# EAGLE board PCB (EAGLE 9.7.0)
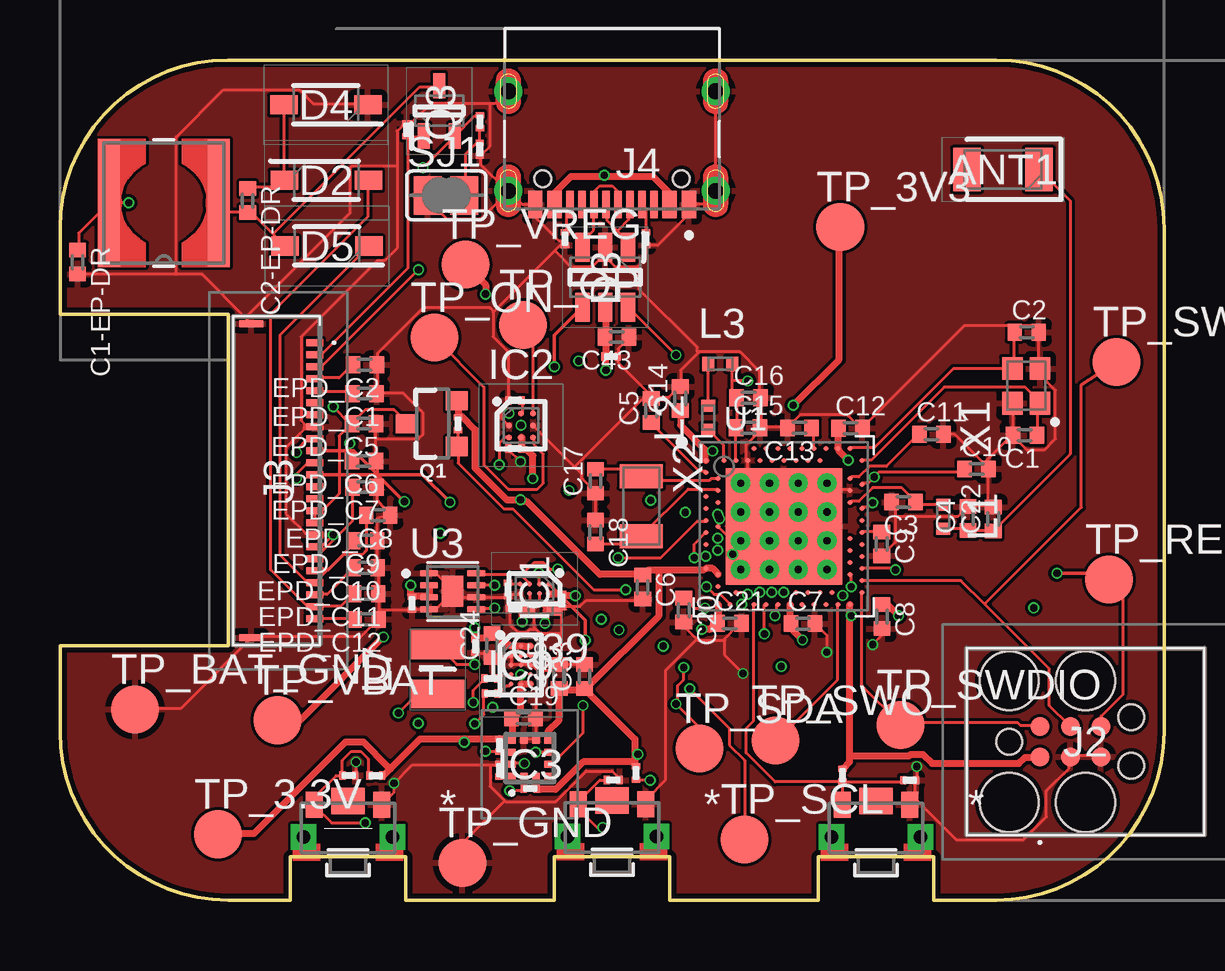
[diagram p0: board, top side]
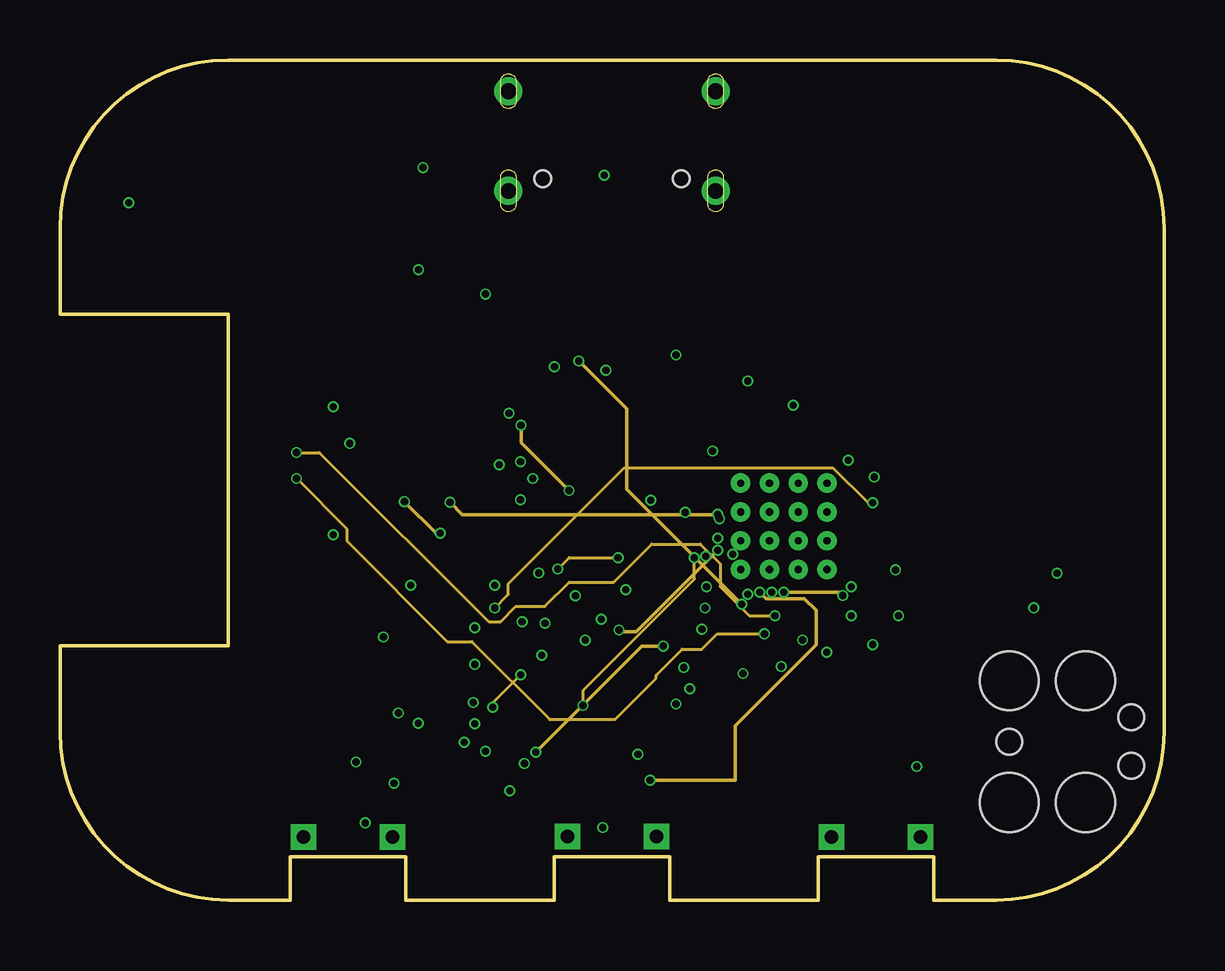
[diagram p1: board, inner layer Route2]
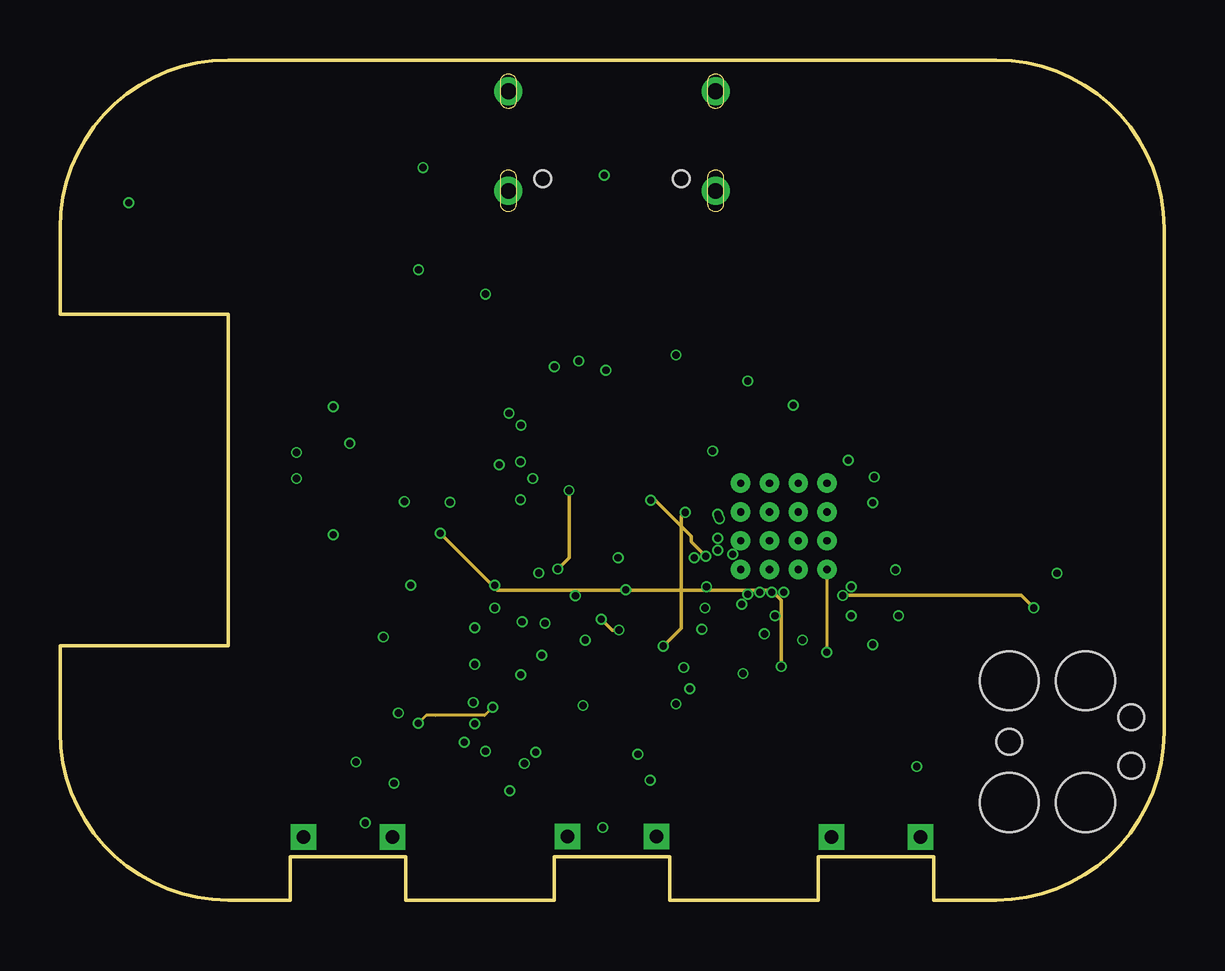
[diagram p2: board, inner layer Route15]
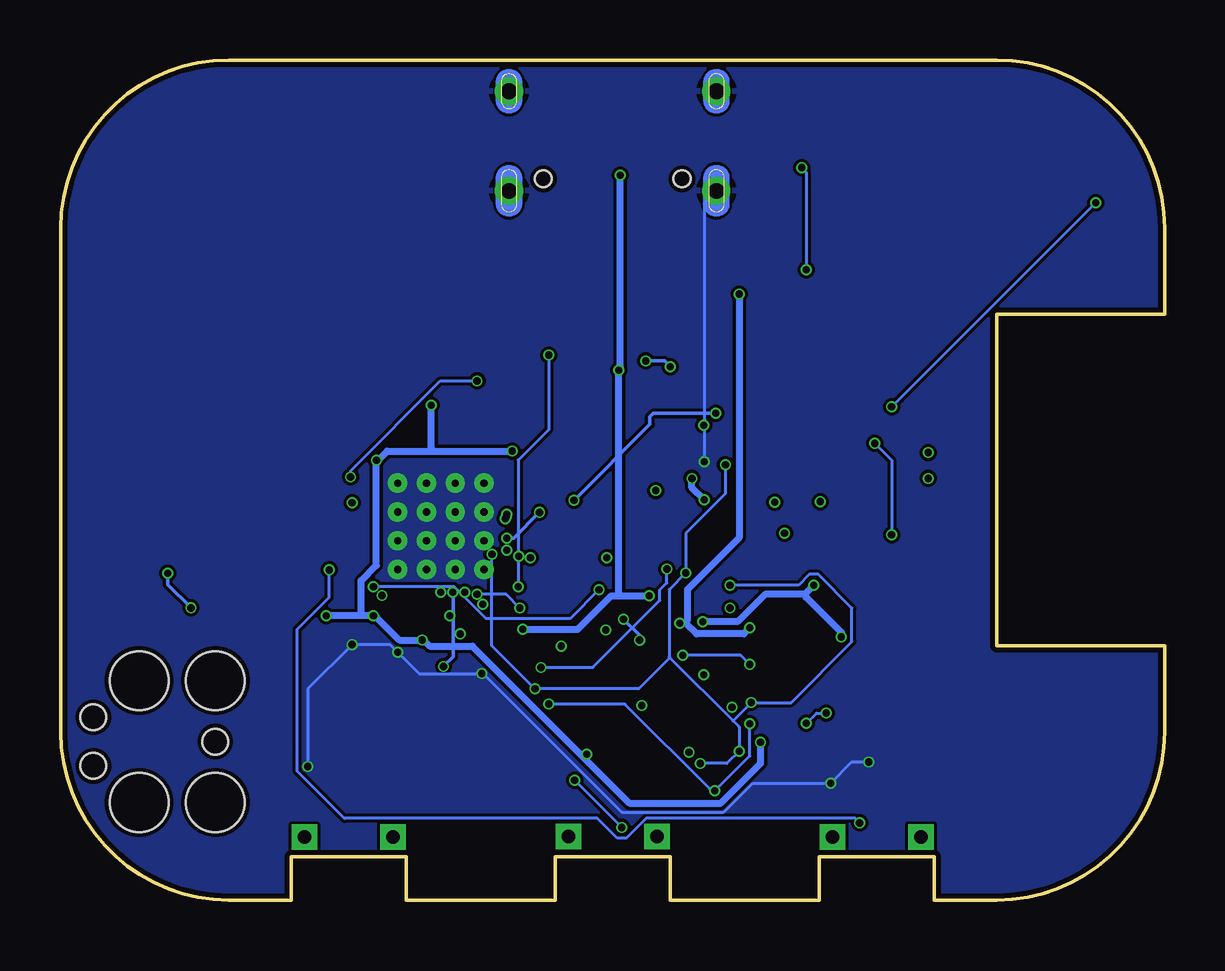
[diagram p3: board, bottom side, seen from below]

Size 46 x 35 mm. Coordinates in mm from the lower left corner, seen from the top.
Outline: 39,0 36.4,0 36.4,1.8 31.6,1.8 31.6,0 25.4,0 25.4,1.8 20.6,1.8 20.6,0 14.4,0 14.4,1.8 9.6,1.8 9.6,0 7,0 arc-90 0,7 0,10.6 7,10.6 7,24.4 0,24.4 0,28 arc-90 7,35 39,35 arc-90 46,28 46,23.94 46,20.77 46,18.92 46,15.76 46,7 arc-90 39,0
Copper layers (1+2*15+16): Top 0.035mm / dielectric 1.6mm / Route2 0.035mm / dielectric 0.15mm / Route15 0.035mm / dielectric 0.2mm / Bottom 0.035mm
Design rules "jlcpcb-2layers.dru *": minimum track width 5mil, minimum drill 0.3mm, track to track 5mil, track to pad 5mil, pad to pad 5mil, via to via 5mil, smd to smd 5mil, copper to edge 0.2mm, drill to drill 6mil, minimum pad ring 10mil, minimum via ring 3mil, stop-mask expansion 4mil, vias tented up to drill 0mil, thermal gap 10mil
Net classes: 1 trasee_alimentare: width 0.3 mm

## Footprints (pad centres in the part's own frame; a part is rotated, then mirrored left to right if it is on the bottom)
2450AT18B100E_ANTC3216X140N = smd 1.15 x 1.8: 1 -1.5,0; 2 1.5,0
PERFECT_0402_0402 = smd 0.6 x 0.7: 1 -0.5,0; 2 0.5,0
GRM011R60J152KE01L_1_0201 = smd 0.35 x 0.25: 1 0,0.275; 2 0,-0.275
NORDIC_NRF_3_RESC0402_N = smd 0.6 x 0.6: 1 -0.55,0; 2 0.55,0
ESP32_C6_LIBRARY_5_SOD3716X135N = smd 1.15 x 0.8: 1 -1.75,0; 2 1.75,0
ESP32_C6_LIBRARY_3_SOT95P280X145-6N = smd 1.2 x 0.6: 1 -1.25,0.95; 2 -1.25,0; 3 -1.25,-0.95; 4 1.25,-0.95; 5 1.25,0; 6 1.25,0.95
BQ25180YBGR_BGA8C40P2X4_100X155X50 = smd 0.2 x 0.2: A1 -0.2,0.6; A2 0.2,0.6; B1 -0.2,0.2; B2 0.2,0.2; C1 -0.2,-0.2; C2 0.2,-0.2; D1 -0.2,-0.6; D2 0.2,-0.6
DRV2605YZFR_BGA9C50P3X3_144X144X62 = smd 0.25 x 0.25: A1 -0.5,0.5; A2 0,0.5; A3 0.5,0.5; B1 -0.5,0; B2 0,0; B3 0.5,0; C1 -0.5,-0.5; C2 0,-0.5; C3 0.5,-0.5
BMA423_BMA423 = smd 0.3 x 0.35: 1 -0.75,-0.775; 2 -0.25,-0.775; 3 0.25,-0.775; 4 0.75,-0.775; 7 0.75,0.775; 8 0.25,0.775; 9 -0.25,0.775; 10 -0.75,0.775 | smd 0.35 x 0.3: 5 0.775,-0.25; 6 0.775,0.25; 11 -0.775,0.25; 12 -0.775,-0.25
RT6160AWSC_BGA15C40P3X5_140X230X60 = smd 0.216 x 0.216: A1 -0.4,0.8; A2 0,0.8; A3 0.4,0.8; B1 -0.4,0.4; B2 0,0.4; B3 0.4,0.4; C1 -0.4,0; C2 0,0; C3 0.4,0; D1 -0.4,-0.4; D2 0,-0.4; D3 0.4,-0.4; E1 -0.4,-0.8; E2 0,-0.8; E3 0.4,-0.8
TC2030-IDC_TC2030IDC = smd 0.783 x 0.783: 1 -0.953,-0.635; 2 -0.953,0.635; 3 0.317,-0.635; 4 0.317,0.635; 5 1.588,-0.635; 6 1.588,0.635 | hole 2.451: -2.223,-2.54; -2.223,2.54; 0.952,-2.54; 0.952,2.54 | hole 1.067: -2.223,0; 2.857,-1.016; 2.857,1.016
503480-2400_5034802400 = smd 0.3 x 0.7: 1 -5.75,1.525; 2 -5.25,1.525; 3 -4.75,1.525; 4 -4.25,1.525; 5 -3.75,1.525; 6 -3.25,1.525; 7 -2.75,1.525; 8 -2.25,1.525; 9 -1.75,1.525; 10 -1.25,1.525; 11 -0.75,1.525; 12 -0.25,1.525; 13 0.25,1.525; 14 0.75,1.525; 15 1.25,1.525; 16 1.75,1.525; 17 2.25,1.525; 18 2.75,1.525; 19 3.25,1.525; 20 3.75,1.525; 21 4.25,1.525; 22 4.75,1.525; 23 5.25,1.525; 24 5.75,1.525 | smd 0.3 x 1: MP1 -6.54,-1.125; MP2 6.54,-1.125
KH-TYPE-C-16P_KINGHELM_KH-TYPE-C-16P = smd 0.6 x 1.15: A1_B12 -3.2,4.725; A4_B9 -2.4,4.725; A9_B4 2.4,4.725; A12_B1 3.2,4.725 | smd 0.3 x 1.15: A5 -1.25,4.725; A6 -0.25,4.725; A7 0.25,4.725; A8 1.25,4.725; B5 1.75,4.725; B6 0.75,4.725; B7 -0.75,4.725; B8 -1.75,4.725 | drill 0.65 pad 1.05: SH1 -4.32,0; SH2 4.32,0; SH3 -4.32,4.15; SH4 4.32,4.15 | hole 0.7: -2.89,3.65; 2.89,3.65
NORDIC_NRF_2_RESC0402_L = smd 0.5 x 0.6: 1 -0.5,0; 2 0.5,0
ESP32_C6_LIBRARY_2_IND_4828-WE-TPC_WRE = smd 0.9 x 5.3: 1 -2.286,0; 2 2.286,0
MLP2016SR47MT0S1_INDC2016X100N = smd 1.2 x 2.2: 1 -1.028,0; 2 1.028,0
ESP32_C6_LIBRARY_4_ESP32_C6_LIBRARY_4_ESP32_C6_LIBRARY_4_ESP32_C6_LIBRARY_4_ESP32_WROVER_SPARKFUN-DISCRETESEMI_SOT23-3 = smd 0.8 x 0.9: 1 -0.95,-1; 2 0.95,-1; 3 0,1.1
ESP32_C6_LIBRARY_6_SOT65P210X110-3N = smd 1.05 x 0.5: 1 -1.05,0.65; 2 -1.05,-0.65; 3 1.05,0
CPF0201D7K68C1_0201 = smd 0.35 x 0.25: 1 0,0.275; 2 0,-0.275
ESP32_C6_LIBRARY_7_JUMPER_SJ = smd 1.168 x 1.6: 1 -0.762,0; 2 0.762,0
2025-10-22_07-23-44_LIBRARY_SW_EVP-AKE31A_PAN = smd 0.711 x 1.092: 1 -1.4,-0.972; 2 1.4,-0.972 | drill 0.559 pad 0.914 square: 3 -1.848,0.381; 4 1.848,0.381 | smd 1.397 x 1.092: 5 0,-1.124
HECTOR_WATCH_1_TP20R = smd 2 x 2: TP 0,0
NORDIC_NRF_4_AQFN50P700X700X85_HS-74N = smd 4.85 x 4.85: P$74 0,0 | drill 0.3 pad 0.6: P$75 -1.8,1.8; P$76 -0.6,1.8; P$77 0.6,1.8; P$78 1.8,1.8; P$79 -1.8,0.6; P$80 -0.6,0.6; P$81 0.6,0.6; P$82 1.8,0.6; P$83 -1.8,-0.6; P$84 -0.6,-0.6; P$85 0.6,-0.6; P$86 1.8,-0.6; P$87 -1.8,-1.8; P$88 -0.6,-1.8; P$89 0.6,-1.8; P$90 1.8,-1.8 | smd 0.2 x 0.2: P$A8 -1.25,3.25; P$A10 -0.75,3.25; P$A12 -0.25,3.25; P$A14 0.25,3.25; P$A16 0.75,3.25; P$A18 1.25,3.25; P$A20 1.75,3.25; P$A22 2.25,3.25; P$A23 2.75,3.25; P$AA24 3.25,-2.25; P$AB2 -2.75,-2.5; P$AC5 -2,-2.75; P$AC9 -1,-2.75; P$AC11 -0.5,-2.75; P$AC13 0,-2.75; P$AC15 0.5,-2.75; P$AC17 1,-2.75; P$AC19 1.5,-2.75; P$AC21 2,-2.75; P$AC24 3.25,-2.75; P$AD2 -2.75,-3.25; P$AD4 -2.25,-3.25; P$AD6 -1.75,-3.25; P$AD8 -1.25,-3.25; P$AD10 -0.75,-3.25; P$AD12 -0.25,-3.25; P$AD14 0.25,-3.25; P$AD16 0.75,-3.25; P$AD18 1.25,-3.25; P$AD20 1.75,-3.25; P$AD22 2.25,-3.25; P$AD23 2.75,-3.25; P$B1 -3.25,2.75; P$B3 -2.5,2.75; P$B5 -2,2.75; P$B7 -1.5,2.75; P$B9 -1,2.75; P$B11 -0.5,2.75; P$B13 0,2.75; P$B15 0.5,2.75; P$B17 1,2.75; P$B19 1.5,2.75; P$B24 3.25,2.75; P$C1 -3.25,2.25; P$D2 -2.75,2; P$D23 2.75,2; P$E24 3.25,1.75; P$F2 -2.75,1.5; P$F23 2.75,1.5; P$G1 -3.25,1.25; P$H2 -2.75,1; P$H23 2.75,1; P$J1 -3.25,0.75; P$J24 3.25,0.75; P$K2 -2.75,0.5; P$L1 -3.25,0.25; P$L24 3.25,0.25; P$M2 -2.75,0; P$N1 -3.25,-0.25; P$N24 3.25,-0.25; P$P2 -2.75,-0.5; P$P23 2.75,-0.5; P$R1 -3.25,-0.75; P$R24 3.25,-0.75; P$T2 -2.75,-1; P$T23 2.75,-1; P$U1 -3.25,-1.25; P$U24 3.25,-1.25; P$V23 2.75,-1.5; P$W1 -3.25,-1.75; P$W24 3.25,-1.75; P$Y2 -2.75,-2; P$Y23 2.75,-2
ESP32_C6_LIBRARY_SON50P200X200X80-9N = smd 0.76 x 0.27: 1 -0.985,0.75; 2 -0.985,0.25; 3 -0.985,-0.25; 4 -0.985,-0.75; 5 0.985,-0.75; 6 0.985,-0.25; 7 0.985,0.25; 8 0.985,0.75 | smd 0.9 x 1.3: 9 0,0
NORDIC_NRF_BT-XTAL_2016_N = smd 0.95 x 0.85: 1 -0.725,-0.575; 2 0.725,-0.575; 3 0.725,0.575; 4 -0.725,0.575
NORDIC_NRF_1_XTAL_3215_N = smd 1 x 1.8: 1 -1.25,0; 2 1.25,0

## Placement (x,y rotation side)
ANT1  2450AT18B100E  [2450AT18B100E_ANTC3216X140N]  39.29,30.44 180 top
C1  12pF  [PERFECT_0402_0402]  40.2,19.36 180 top
C1-EP-DR  10uF  [PERFECT_0402_0402]  0.73,26.58 270 top
C2  12pF  [PERFECT_0402_0402]  40.28,23.66 0 top
C2-EP-DR  4.7uF/25V  [PERFECT_0402_0402]  7.82,29.14 270 top
C3  1pF  [PERFECT_0402_0402]  35.15,16.58 180 top
C4  1pF  [PERFECT_0402_0402]  37.83,15.89 90 top
C5  100nF  [PERFECT_0402_0402]  24.63,20.39 90 top
C6  4.7μF  [PERFECT_0402_0402]  24.28,13.04 270 top
C7  100nF  [PERFECT_0402_0402]  30.95,11.52 0 top
C8  100nF  [PERFECT_0402_0402]  34.25,11.81 270 top
C9  820pF  [PERFECT_0402_0402]  34.24,14.84 270 top
C10  N.C.  [PERFECT_0402_0402]  38.19,17.96 0 top
C11  100pF  [PERFECT_0402_0402]  36.31,19.41 0 top
C12  100nF  [PERFECT_0402_0402]  32.93,19.66 0 top
C13  N.C.  [PERFECT_0402_0402]  30.82,19.67 180 top
C14  4.7μF  [PERFECT_0402_0402]  25.84,20.89 90 top
C15  1.0μF  [PERFECT_0402_0402]  28.67,19.68 0 top
C16  47nF  [PERFECT_0402_0402]  28.69,20.93 0 top
C17  12pF  [PERFECT_0402_0402]  22.31,17.45 90 top
C18  12pF  [PERFECT_0402_0402]  22.31,15.33 270 top
C19  100nF  [PERFECT_0402_0402]  19.31,7.58 0 top
C20  4.7μF  [PERFECT_0402_0402]  25.99,12.08 270 top
C21  4.7μF  [PERFECT_0402_0402]  27.9,11.53 0 top
C22  N.C.  [PERFECT_0402_0402]  38.88,15.87 90 top
C23  0.1uF  [GRM011R60J152KE01L_1_0201]  17.31,10.58 180 top
C24  10uF  [PERFECT_0402_0402]  18,10.6 90 top
C25  22uF  [PERFECT_0402_0402]  20.8,9.31 90 top
C27  0.1uF  [GRM011R60J152KE01L_1_0201]  14.67,12.36 180 top
C29  1uF  [GRM011R60J152KE01L_1_0201]  12.03,5.19 270 top
C30  1uF  [GRM011R60J152KE01L_1_0201]  35.4,4.99 270 top
C31  1uF  [GRM011R60J152KE01L_1_0201]  23.05,5 270 top
C32  1uF  [GRM011R60J152KE01L_1_0201]  18.96,20.82 90 top
C33  22uF  [PERFECT_0402_0402]  21.85,9.31 90 top
C34  0.1uF  [GRM011R60J152KE01L_1_0201]  18.95,18.81 90 top
C37  1uF  [GRM011R60J152KE01L_1_0201]  18.97,12.13 90 top
C38  1uF  [GRM011R60J152KE01L_1_0201]  20.92,12.48 180 top
C39  10uF  [NORDIC_NRF_3_RESC0402_N]  20.04,12.14 180 top
C42  0.1uF  [GRM011R60J152KE01L_1_0201]  22.96,22.64 90 top
C43  4.7uF  [PERFECT_0402_0402]  23.2,23.45 180 top
D2  MBR0530  [ESP32_C6_LIBRARY_5_SOD3716X135N]  11.1,29.99 0 top
D3  USBLC6-2SC6Y  [ESP32_C6_LIBRARY_3_SOT95P280X145-6N]  22.72,25.95 270 top
D4  MBR0530  [ESP32_C6_LIBRARY_5_SOD3716X135N]  11.08,33.13 180 top
D5  MBR0530  [ESP32_C6_LIBRARY_5_SOD3716X135N]  11.12,27.25 180 top
EPD_C1  1uF/50V  [PERFECT_0402_0402]  12.69,21.1 180 top
EPD_C2  1uF/50V  [PERFECT_0402_0402]  12.7,22.3 180 top
EPD_C5  0.1uF/50V  [PERFECT_0402_0402]  12.67,19.85 180 top
EPD_C6  1uF/50V  [PERFECT_0402_0402]  12.66,18.29 180 top
EPD_C7  1uF/50V  [PERFECT_0402_0402]  12.68,17.2 180 top
EPD_C8  1uF/50V  [PERFECT_0402_0402]  13.26,16.03 180 top
EPD_C9  1uF/50V  [PERFECT_0402_0402]  12.72,14.97 180 top
EPD_C10  1uF/50V  [PERFECT_0402_0402]  12.74,13.84 180 top
EPD_C11  1uF/50V  [PERFECT_0402_0402]  12.76,12.76 180 top
EPD_C12  1uF/50V  [PERFECT_0402_0402]  12.78,11.69 180 top
IC1  BQ25180YBGR  [BQ25180YBGR_BGA8C40P2X4_100X155X50]  19.77,12.97 270 top
IC2  DRV2605YZFR  [DRV2605YZFR_BGA9C50P3X3_144X144X62]  19.21,19.78 0 top
IC3  BMA421  [BMA423_BMA423]  19.58,5.91 0 top
IC9  RT6160AWSC  [RT6160AWSC_BGA15C40P3X5_140X230X60]  19.2,9.79 0 top
J2  TC2030-IDC  [TC2030-IDC_TC2030IDC]  41.78,6.6 0 top
J3  503480-2400  [503480-2400_5034802400]  9.09,17.47 270 top
J4  KH-TYPE-C-16P  [KH-TYPE-C-16P_KINGHELM_KH-TYPE-C-16P]  23,33.7 180 top
L1  3.9nH  [NORDIC_NRF_2_RESC0402_L]  36.8,15.97 270 top
L2  10μH  [NORDIC_NRF_2_RESC0402_L]  27.01,20.09 90 top
L3  15nH  [NORDIC_NRF_2_RESC0402_L]  27.5,22.34 0 top
L5  68uH  [ESP32_C6_LIBRARY_2_IND_4828-WE-TPC_WRE]  4.33,29.04 180 top
L7  FTC252012SR47MBCA  [MLP2016SR47MT0S1_INDC2016X100N]  15.74,9.61 270 top
Q1  20V/4.2A/52mΩ/1.4W  [ESP32_C6_LIBRARY_4_ESP32_C6_LIBRARY_4_ESP32_C6_LIBRARY_4_ESP32_C6_LIBRARY_4_ESP32_WROVER_SPARKFUN-DISCRETESEMI_SOT23-3]  15.53,19.85 90 top
Q3  SI1308EDL-T1-GE3  [ESP32_C6_LIBRARY_6_SOT65P210X110-3N]  15.8,32.88 90 top
R1_EP_DR  0.47  [CPF0201D7K68C1_0201]  17.5,32.43 180 top
R1_USB  5K1  [CPF0201D7K68C1_0201]  24.41,27.55 180 top
R2  0  [CPF0201D7K68C1_0201]  17.97,8.61 90 top
R2_EP_DR  10K  [CPF0201D7K68C1_0201]  14.44,32.09 0 top
R2_USB  5K1  [CPF0201D7K68C1_0201]  21.04,27.55 0 top
R3  0  [CPF0201D7K68C1_0201]  18.31,5.41 0 top
R4  0  [CPF0201D7K68C1_0201]  17.95,9.23 90 top
R5  10k  [CPF0201D7K68C1_0201]  32.6,5.2 180 top
R7  10k  [CPF0201D7K68C1_0201]  13.15,5.18 90 top
R8  10k  [CPF0201D7K68C1_0201]  24,5.29 180 top
R9  10K  [CPF0201D7K68C1_0201]  18.66,12.94 180 top
R17  3K3  [CPF0201D7K68C1_0201]  18.31,6.45 0 top
R18  3K3  [CPF0201D7K68C1_0201]  19.59,4.64 270 top
R_PWR_EPD  10K  [CPF0201D7K68C1_0201]  16.59,19.85 180 top
R_TYPE_SEL  2.2  [CPF0201D7K68C1_0201]  17.49,31.28 180 top
SJ1  [ESP32_C6_LIBRARY_7_JUMPER_SJ]  16.09,29.36 0 top
SW_DN  [2025-10-22_07-23-44_LIBRARY_SW_EVP-AKE31A_PAN]  12,3 180 top
SW_ENT  [2025-10-22_07-23-44_LIBRARY_SW_EVP-AKE31A_PAN]  23,3.02 180 top
SW_UP  [2025-10-22_07-23-44_LIBRARY_SW_EVP-AKE31A_PAN]  34,3 180 top
TP_3.3V  HECTOR_WATCH_1_TPTP20R  [HECTOR_WATCH_1_TP20R]  6.59,2.74 0 top
TP_3V3  HECTOR_WATCH_1_TPTP20R  [HECTOR_WATCH_1_TP20R]  32.51,28.04 0 top
TP_BAT_GND  HECTOR_WATCH_1_TPTP20R  [HECTOR_WATCH_1_TP20R]  3.13,7.94 0 top
TP_GND  HECTOR_WATCH_1_TPTP20R  [HECTOR_WATCH_1_TP20R]  16.77,1.55 0 top
TP_ON  HECTOR_WATCH_1_TPTP20R  [HECTOR_WATCH_1_TP20R]  15.6,23.43 0 top
TP_OP  HECTOR_WATCH_1_TPTP20R  [HECTOR_WATCH_1_TP20R]  19.29,23.96 0 top
TP_RESET  HECTOR_WATCH_1_TPTP20R  [HECTOR_WATCH_1_TP20R]  43.71,13.36 0 top
TP_SCL  HECTOR_WATCH_1_TPTP20R  [HECTOR_WATCH_1_TP20R]  28.53,2.53 0 top
TP_SDA  HECTOR_WATCH_1_TPTP20R  [HECTOR_WATCH_1_TP20R]  26.64,6.31 0 top
TP_SWDCLK  HECTOR_WATCH_1_TPTP20R  [HECTOR_WATCH_1_TP20R]  44.03,22.42 0 top
TP_SWDIO  HECTOR_WATCH_1_TPTP20R  [HECTOR_WATCH_1_TP20R]  35.02,7.29 0 top
TP_SWO  HECTOR_WATCH_1_TPTP20R  [HECTOR_WATCH_1_TP20R]  29.81,6.64 0 top
TP_VBAT  HECTOR_WATCH_1_TPTP20R  [HECTOR_WATCH_1_TP20R]  9.06,7.49 0 top
TP_VREG  HECTOR_WATCH_1_TPTP20R  [HECTOR_WATCH_1_TP20R]  16.9,26.48 0 top
U1  NRF52840_QF  [NORDIC_NRF_4_AQFN50P700X700X85_HS-74N]  30.16,15.57 0 top
U3  MAX17048G+T10  [ESP32_C6_LIBRARY_SON50P200X200X80-9N]  16.36,12.86 0 top
X1  32MHz  [NORDIC_NRF_BT-XTAL_2016_N]  40.26,21.42 90 top
X2  32.768kHz  [NORDIC_NRF_1_XTAL_3215_N]  24.22,16.41 270 top

## Library data of the parts
ANT1 = InkTime_v5; ARROW_PART_NUMBER: 2450AT18B100E; ARROW_PRICE-STOCK: https://www.arrow.com/en/products/2450at18b100e/johanson-dielectrics?utm_currency=USD&region=nac; DESCRIPTION: Antennas 2.45GHz ANTENNA; HEIGHT: 1.4mm; MANUFACTURER_NAME: JOHANSON TECHNOLOGY; MANUFACTURER_PART_NUMBER: 2450AT18B100E; MOUSER_PART_NUMBER: 609-2450AT18B100E; MOUSER_PRICE-STOCK: https://www.mouser.co.uk/ProductDetail/Johanson-Technology/2450AT18B100E?qs=yCnrNFeXz%252Bh5MFsFIXGZGA%3D%3D
C1 C1-EP-DR C2 C2-EP-DR C3-C25 C27 C29-C34 C37-C39 C42 C43 EPD_C1 EPD_C2 EPD_C5-EPD_C12 L1-L3 R1_EP_DR R1_USB R2 R2_EP_DR R2_USB R3-R5 R7-R9 R17 R18 R_PWR_EPD R_TYPE_SEL SJ1 TP_3.3V TP_3V3 TP_BAT_GND TP_GND TP_ON TP_OP TP_RESET TP_SCL TP_SDA TP_SWDCLK TP_SWDIO TP_SWO TP_VBAT TP_VREG U1 X1 X2 = InkTime_v5
D2 D4 D5 = InkTime_v5; AVAILABILITY: In Stock; CHECK_PRICES: https://www.snapeda.com/parts/MBR0530/Onsemi/view-part/?ref=eda; DESCRIPTION: Diode Schottky 30 V 500mA Surface Mount SOD-123; MF: ON Semiconductor; MP: MBR0530; PACKAGE: SOD-123-2 ON Semiconductor; PRICE: None; PURCHASE-URL: https://www.snapeda.com/api/url_track_click_mouser/?unipart_id=179458&manufacturer=ON Semiconductor&part_name=MBR0530&search_term=None; SNAPEDA_LINK: https://www.snapeda.com/parts/MBR0530/Onsemi/view-part/?ref=snap
D3 = InkTime_v5; AVAILABILITY: In Stock; CHECK_PRICES: https://www.snapeda.com/parts/USBLC6-2SC6Y/STMicroelectronics/view-part/?ref=eda; DESCRIPTION: 17V Clamp 5A (8/20µs) Ipp Tvs Diode Surface Mount SOT-23-6; MF: STMicroelectronics; MP: USBLC6-2SC6Y; PACKAGE: SOT-23-6 STMicroelectronics; PRICE: None; SNAPEDA_LINK: https://www.snapeda.com/parts/USBLC6-2SC6Y/STMicroelectronics/view-part/?ref=snap
IC1 = InkTime_v5; ARROW_PART_NUMBER: BQ25180YBGR; ARROW_PRICE-STOCK: https://www.arrow.com/en/products/bq25180ybgr/texas-instruments?utm_currency=USD&region=nac; DESCRIPTION: Charger IC Lithium Ion/Polymer, Lithium Iron Phosphate 8-DSBGA (1.6x1.1); HEIGHT: 0.5mm; MANUFACTURER_NAME: Texas Instruments; MANUFACTURER_PART_NUMBER: BQ25180YBGR; MOUSER_PART_NUMBER: 595-BQ25180YBGR; MOUSER_PRICE-STOCK: https://www.mouser.co.uk/ProductDetail/Texas-Instruments/BQ25180YBGR?qs=doiCPypUmgEWjAK%252BJAX6Tw%3D%3D
IC2 = InkTime_v5; ARROW_PART_NUMBER: DRV2605YZFR; ARROW_PRICE-STOCK: https://www.arrow.com/en/products/drv2605yzfr/texas-instruments?region=nac; DESCRIPTION: Haptic Driver for ERM/LRA with Built-In Library and Smart Loop Architecture; HEIGHT: 0.625mm; MANUFACTURER_NAME: Texas Instruments; MANUFACTURER_PART_NUMBER: DRV2605YZFR
IC3 = InkTime_v5; ARROW_PART_NUMBER: BMA423; ARROW_PRICE-STOCK: https://www.arrow.com/en/products/bma423/bosch; DESCRIPTION: Accelerometers Triaxial low-g 12bit Acceleration Sensor; HEIGHT: 1mm; MANUFACTURER_NAME: BOSCH; MANUFACTURER_PART_NUMBER: BMA423; MOUSER_PART_NUMBER: 262-BMA423; MOUSER_PRICE-STOCK: https://www.mouser.co.uk/ProductDetail/Bosch-Sensortec/BMA423?qs=HXFqYaX1Q2xC%252BSgeGoX3mg%3D%3D
IC9 = InkTime_v5; DESCRIPTION: Buck-Boost Regulator Positive Output Step-Up/Step-Down I2C DC-DC Controller IC 15-WL-CSP (BSC) (1.4x2.3); HEIGHT: 0.6mm; MANUFACTURER_NAME: RICHTEK; MANUFACTURER_PART_NUMBER: RT6160AWSC; MOUSER_PART_NUMBER: 835-RT6160AWSC; MOUSER_PRICE-STOCK: https://www.mouser.co.uk/ProductDetail/Richtek/RT6160AWSC?qs=amGC7iS6iy%2FLd9PSoixZXQ%3D%3D
J2 = InkTime_v5; DESCRIPTION: CABLE ADAPTER 6 POS; HEIGHT: 19mm; MANUFACTURER_NAME: Tag Connect; MANUFACTURER_PART_NUMBER: TC2030-IDC
J3 = InkTime_v5; DESCRIPTION: FFC & FPC Connectors 0.5mm FPC RA SMT Dual Contact 24Ckt; HEIGHT: 1.87mm; MANUFACTURER_NAME: Molex; MANUFACTURER_PART_NUMBER: 503480-2400; MOUSER_PART_NUMBER: 538-503480-2400; MOUSER_PRICE-STOCK: https://www.mouser.co.uk/ProductDetail/Molex/503480-2400?qs=OAhjpuo3Vu7efIoxFh9AOw%3D%3D
J4 = InkTime_v5; AVAILABILITY: Not in stock; CHECK_PRICES: https://www.snapeda.com/parts/KH-TYPE-C-16P/Kinghelm/view-part/?ref=eda; MF: kinghelm; MP: KH-TYPE-C-16P; PACKAGE: None; PRICE: None; SNAPEDA_LINK: https://www.snapeda.com/parts/KH-TYPE-C-16P/Kinghelm/view-part/?ref=snap
L5 = InkTime_v5; COPYRIGHT: Copyright (C) 2024 Ultra Librarian. All rights reserved.; MANUFACTURER_PART_NUMBER: 744043680; MFR_NAME: Wurth Electronics
L7 = InkTime_v5; DESCRIPTION: SMD / SMT Inductors (Coils), L=0.47?H, L x W x T :; HEIGHT: 1mm; JLCPCB: https://jlcpcb.com/partdetail/6763488-FTC252012SR47MBCA/C5832368; MANUFACTURER_NAME: TDK; MANUFACTURER_PART_NUMBER: FTC252012SR47MBCA
Q1 = InkTime_v5; PROD_ID: TRAN-14388
Q3 = InkTime_v5; AVAILABILITY: In Stock; CHECK_PRICES: https://www.snapeda.com/parts/SI1308EDL-T1-GE3/Vishay+Siliconix/view-part/?ref=eda; DESCRIPTION: Si1308EDL-T1-GE3 N-channel MOSFET Transistor, 1.5 A, 30 V, 3-Pin SC-70 | Siliconix / Vishay SI1308EDL-T1-GE3; MF: Vishay Siliconix; MP: SI1308EDL-T1-GE3; PACKAGE: SOT-323 Vishay Semiconductor; PRICE: None; PURCHASE-URL: https://www.snapeda.com/api/url_track_click_mouser/?unipart_id=274603&manufacturer=Vishay Siliconix&part_name=SI1308EDL-T1-GE3&search_term=None; SNAPEDA_LINK: https://www.snapeda.com/parts/SI1308EDL-T1-GE3/Vishay+Siliconix/view-part/?ref=snap
SW_DN SW_ENT SW_UP = InkTime_v5; COPYRIGHT: Copyright (C) 2025 Ultra Librarian. All rights reserved.; DIGI-KEY_PART_NUMBER_1: P123437TR-ND; DIGI-KEY_PART_NUMBER_2: P123437CT-ND; DIGI-KEY_PART_NUMBER_3: P123437DKR-ND; MANUFACTURER_NAME: Panasonic; MANUFACTURER_PART_NUMBER: EVP-AKE31A
U3 = InkTime_v5; AVAILABILITY: In Stock; CHECK_PRICES: https://www.snapeda.com/parts/MAX17048G+T10/Analog+Devices/view-part/?ref=eda; DESCRIPTION: 3µA 1-Cell/2-Cell Fuel Gauge with ModelGauge; MF: Analog Devices; MP: MAX17048G+T10; PACKAGE: TDFN-8 Maxim; PRICE: None; PURCHASE-URL: https://www.snapeda.com/api/url_track_click_mouser/?unipart_id=329239&manufacturer=Analog Devices&part_name=MAX17048G+T10&search_term=None; SNAPEDA_LINK: https://www.snapeda.com/parts/MAX17048G+T10/Analog+Devices/view-part/?ref=snap

## Nets
3V3 [trasee_alimentare]: C6.1 C7.1 C8.1 C12.1 C14.1 C19.1 C25.1 C33.1 C34.2 IC2.C2 IC3.3 IC3.7 IC3.10 IC9.E2 IC9.E3 J2.1 Q1.2 R5.2 R7.2 R8.2 R17.1 R18.1 R_PWR_EPD.2 TP_3.3V.TP TP_3V3.TP U1.P$A22 U1.P$AD14 U1.P$AD23 U1.P$B1 U1.P$W1 U1.P$Y2
ALERT: U1.P$J24 U3.5
D+: D3.4 U1.P$AD6
D-: D3.6 U1.P$AD4
DEC1: C5.1 U1.P$C1
DEC3: C11.1 U1.P$D23
DEC4_6: C10.1 C15.1 C16.1 L3.2 U1.P$B5 U1.P$E24
DN: D3.1 J4.A7 J4.B7
DP: D3.3 J4.A6 J4.B6
EPD_3V3: C1-EP-DR.1 EPD_C5.2 J3.15 J3.16 L5.2 Q1.3
EPD_BUSY: J3.9 U1.P$AD12
EPD_CS: J3.12 U1.P$K2
EPD_DC: J3.11 U1.P$AD10
EPD_RST: J3.10 U1.P$AC11
GDR: J3.2 Q3.1 R2_EP_DR.2
GND: C1-EP-DR.2 C1.2 C2.2 C3.2 C4.2 C5.2 C6.2 C7.2 C8.2 C9.2 C10.2 C11.2 C12.2 C13.2 C14.2 C15.2 C16.2 C17.1 C18.1 C19.2 C20.2 C21.2 C22.2 C23.1 C24.1 C25.2 C27.1 C29.1 C30.1 C31.1 C32.1 C33.2 C34.1 C37.1 C38.1 C39.2 C42.2 C43.1 D3.2 D4.1 EPD_C1.1 EPD_C2.1 EPD_C5.1 EPD_C6.1 EPD_C7.1 EPD_C8.1 EPD_C9.1 EPD_C10.1 EPD_C11.1 EPD_C12.1 IC1.D2 IC2.B1 IC2.B3 IC3.8 IC3.9 IC9.B1 IC9.C1 IC9.C2 IC9.C3 J2.3 J2.5 J3.8 J3.17 J3.MP1 J3.MP2 J4.A1_B12 J4.A12_B1 J4.SH1 J4.SH2 J4.SH3 J4.SH4 R1_USB.1 R2_EP_DR.1 R2_USB.2 R3.1 R9.1 R_TYPE_SEL.1 SJ1.1 SW_DN.1 SW_ENT.1 SW_UP.1 TP_BAT_GND.TP TP_GND.TP U1.P$74 U1.P$75 U1.P$76 U1.P$77 U1.P$78 U1.P$79 U1.P$80 U1.P$81 U1.P$82 U1.P$83 U1.P$84 U1.P$85 U1.P$86 U1.P$87 U1.P$88 U1.P$89 U1.P$90 U1.P$B7 U1.P$F23 U3.1 U3.4 U3.6 U3.9 X1.2 X1.4
HAPTIC_EN: IC2.A1 U1.P$U1
IMU_INT1: IC3.5 U1.P$N1
IMU_INT2: IC3.6 U1.P$P2
LX1: IC9.B2 IC9.B3 L7.1
LX2: IC9.D2 L7.2
MOSI: J3.14
N$1: IC9.D1 R4.2
N$2: IC9.E1 R2.2
N$3: IC1.D1 R9.2
N$4: C9.1 U1.P$N24
N$5: L2.2 L3.1
N$6: C3.1 L1.1 U1.P$H23
N$7: IC3.1 R3.2
N$8: L2.1 U1.P$B3
N$9: C1.1 U1.P$B24 X1.1
N$10: C2.1 U1.P$A23 X1.3
N$11: C20.1 U1.P$AC5
N$12: C13.1 U1.P$A18
N$18: J4.B5 R2_USB.1
N$19: J4.A5 R1_USB.2
N$23: C2-EP-DR.2 D5.2 L5.1 Q3.3
N$25: C2-EP-DR.1 D2.1 D4.2
N$27: R1_EP_DR.1 R_TYPE_SEL.2 SJ1.2
N$28: EPD_C1.2 J3.5
N$29: EPD_C2.2 J3.4
N$30: EPD_C6.2 J3.18
N$31: EPD_C7.2 J3.19
N$32: EPD_C8.2 J3.20
N$33: EPD_C10.2 J3.22
N$34: EPD_C12.2 J3.24
N$37: C32.2 IC2.A2
OUT+: IC2.A3 TP_OP.TP
OUT-: IC2.C3 TP_ON.TP
P0.00/XL1: C17.2 U1.P$D2 X2.1
P0.01/XL2: C18.2 U1.P$F2 X2.2
P0.04: U1.P$J1
P0.09: U1.P$L24
P0.13: C30.2 R5.1 SW_UP.2 U1.P$AD8
P0.14: C31.2 R8.1 SW_ENT.2 U1.P$AC9
P0.19: U1.P$AC15
P0.20: U1.P$AD16
P0.21: U1.P$AC17
P0.22: U1.P$AD18
P0.23: U1.P$AC19
P0.24: U1.P$AD20
P0.25: U1.P$AC21
P0.26: U1.P$G1
P0.27: U1.P$H2
P1.01: Q1.1 R_PWR_EPD.1 U1.P$Y23
P1.02: C29.2 R7.1 SW_DN.2 U1.P$W24
P1.03: U1.P$V23
P1.04: U1.P$U24
P1.05: U1.P$T23
P1.06: U1.P$R24
P1.07: U1.P$P23
P1.09: U1.P$R1
PMIC_INT: IC1.A1 U1.P$T2
PREVGH: D5.1 EPD_C9.2 J3.21
PREVGL: D2.2 EPD_C11.2 J3.23
RESE: J3.3 Q3.2 R1_EP_DR.2
RESET: J2.6 TP_RESET.TP U1.P$AC13
RF: ANT1.1 C4.1 C22.1 L1.2
SCK: J3.13
SCL: IC1.B1 IC2.C1 IC3.12 R4.1 R17.2 TP_SCL.TP U1.P$M2 U3.7
SDA: IC1.C1 IC2.B2 IC3.2 R2.1 R18.2 TP_SDA.TP U1.P$L1 U3.8
SWDCLK: J2.4 TP_SWDCLK.TP U1.P$AA24
SWDIO: J2.2 TP_SWDIO.TP U1.P$AC24
SWO: TP_SWO.TP U1.P$AD22
VBAT [trasee_alimentare]: C27.2 C37.2 IC1.C2 TP_VBAT.TP U3.2 U3.3
VBUS [trasee_alimentare]: C21.1 C38.2 C42.1 C43.2 D3.5 IC1.A2 J4.A4_B9 J4.A9_B4 U1.P$AD2
VREG [trasee_alimentare]: C23.2 C24.2 C39.1 IC1.B2 IC9.A1 IC9.A2 IC9.A3 TP_VREG.TP

## Tracks (layer width: path | path; a pad name or v marks a point on that pad's centre or on a via)
3V3  (via drill 0.3)
  Top 0.3: 19.25,18.83 19.25,19.28 IC2.C2 | 19.25,18.83 C34.2 | Q1.2 16.59,20.74 16.59,20.17 R_PWR_EPD.2 16.71,20.17 17.29,19.59 17.29,18.01 18.62,16.67 v19.19,16.67 19.32,16.61 19.44,16.61 22.49,13.56 24.14,13.56 C6.1 24.33,13.56 24.52,13.75 24.97,13.75 | v19.7,17.56 19.7,18.52 19.44,18.77 19.38,18.77 19.25,18.83 | 26.94,13.82 27.19,13.82 27.38,13.63 U1.P$Y2 | 26.94,13.82 U1.P$W1 | 24.97,13.75 26.81,13.75 26.94,13.82 | IC3.7 20.33,6.71 20.33,7.02 20.78,7.47 20.78,8.8 C25.1 20.91,8.74 21.75,8.74 C33.1 | IC3.3 19.82,5.12 19.82,4.67 R18.1 20.02,4.61 20.65,4.61 21.79,5.75 23.83,5.75 23.95,5.75 | 23.95,6.07 23.95,6.71 C33.1 | 23.95,6.07 23.95,5.75 | 23.95,5.75 23.95,5.63 R8.2 | 24.97,13.75 24.97,13.63 24.97,11.85 21.96,8.84 C33.1 | 19.25,8.99 19.57,8.99 IC9.E3 | 19.25,8.99 IC9.E2 | 19.25,8.99 19.19,8.86 19.19,7.91 18.87,7.59 C19.1 18.87,7.47 18.87,6.83 IC3.10 18.81,6.71 18.43,6.71 R17.1 18.3,6.71 16.84,6.71 | 13.76,5.47 15,6.71 16.84,6.71 | 13.76,5.47 13.47,5.18 R7.2 | TP_3.3V.TP 6.62,2.77 8.08,2.77 11.89,6.58 12.65,6.58 13.66,5.56 13.76,5.47 | 26.87,18.71 26.87,18.77 25.86,19.79 25.86,20.36 C14.1 | 26.87,18.71 26.87,18.33 U1.P$B1 | 32.4,18.83 32.4,19.66 C12.1 | 32.4,18.83 U1.P$A22 | U1.P$AD14 30.43,12.29 30.43,11.53 C7.1 30.56,11.4 30.56,11.21 v30.94,10.83 | 32.91,6.01 32.91,5.75 32.65,5.5 R5.2 | 32.91,6.01 32.91,11.85 | 32.91,11.85 32.91,12.29 U1.P$AD23 | v34.94,11.85 34.49,12.29 34.3,12.29 C8.1 | v32.97,11.85 32.91,11.85 | J2.1 40.78,5.94 40.21,5.94 39.95,5.69 36.34,5.69 35.95,6.07 35.45,6.07 35.38,6.01 33.03,6.01 32.91,6.01 | v32.84,18.33 32.46,18.71 32.4,18.83 | v27.19,18.71 27,18.71 26.87,18.71
  Top 0.3: v30.56,20.61 32.46,22.52 32.46,27.98 TP_3V3.TP | v16.84,6.58 16.84,6.71 | v24.08,6.07 23.95,6.07
  Bottom 0.3: v19.7,17.56 19.7,17.18 v19.19,16.67 | 33.48,11.85 v32.97,11.85 32.84,11.79 31.89,10.83 v30.94,10.83 30.81,10.77 30.62,10.58 28.84,10.58 24.24,5.97 | 33.48,11.85 v34.94,11.85 | 33.48,11.85 33.48,11.98 33.48,13.31 32.84,13.94 v32.84,18.33 32.72,18.39 32.4,18.71 30.56,18.71 | 30.56,18.71 v27.19,18.71 | v30.56,20.61 30.56,18.83 30.56,18.71 | v16.84,6.58 16.84,5.69 18.49,4.04 22.3,4.04 24.24,5.97 | v24.08,6.07 24.14,6.07 24.24,5.97
ALERT  (via drill 0.3)
  Top 0.127: v33.86,16.55 33.67,16.36 33.41,16.36 U1.P$J24 | v18.11,12.17 17.35,12.17 U3.5
  Route2 0.127: v33.86,16.55 33.67,16.55 32.21,18.01 23.51,18.01 18.68,13.18 18.68,12.74 v18.11,12.17
D+  (via drill 0.3)
  Top 0.152: v20.6,22.22 20.6,23.53 D3.4
  Route2 0.152: U1.P$AD6 23.61,17.12 23.61,19.44 23.61,20.47 v21.62,22.46
  Bottom 0.152: v21.62,22.46 20.84,22.46 v20.6,22.22
  other vias: 28.41,12.32
D-  (via drill 0.3)
  Top 0.127: v26.94,13.05 27.25,12.74 27.51,12.74 27.89,12.36 U1.P$AD4 | v25.67,22.71 23.7,24.68 D3.6
  Bottom 0.127: v26.94,13.05 26.94,18.33 25.67,19.59 v25.67,22.71
DEC1
  Top 0.127: U1.P$C1 26.87,17.88 26.62,17.88 24.65,19.85 C5.1
DEC3
  Top 0.127: U1.P$D23 32.97,17.63 33.29,17.63 33.73,18.07 34.43,18.07 35.76,19.41 C11.1
DEC4_6  (via drill 0.3)
  Top 0.127: U1.P$B5 28.14,18.33 28.14,19.66 C15.1 28.21,19.72 28.21,20.87 C16.1 28.14,20.99 28.02,21.12 28.02,21.63 | 28.02,21.63 28.02,22.33 L3.2 | U1.P$E24 33.41,17.37 33.67,17.37 v33.92,17.63 34.11,17.82 37.54,17.82 37.67,17.95 C10.1 | v28.65,21.63 28.02,21.63
  Bottom 0.127: v28.65,21.63 30.18,21.63 33.92,17.88 v33.92,17.63
DN
  Top 0.127: 23.22,27.88 23.64,27.47 23.64,27.22 D3.1 | 23.22,27.88 22.81,28.3 22.81,28.93 J4.A7 | J4.B7 23.7,28.93 23.7,28.36 23.25,27.91 23.22,27.88
DP
  Top 0.127: D3.3 21.79,27.22 21.79,27.47 22.24,27.91 22.24,28.93 J4.B6 22.3,28.99 22.3,29.56 22.49,29.76 23,29.76 23.19,29.56 23.19,28.99 J4.A6
EPD_3V3  (via drill 0.3)
  Top 0.127: C1-EP-DR.1 0.77,27.09 0.77,27.79 1.98,28.99 L5.2 2.11,29.06 v2.87,29.06 | J3.16 10.62,16.17 J3.15 10.68,16.17 10.87,16.17 11.63,16.93 11.63,19.34 12.14,19.85 EPD_C5.2 | EPD_C5.2 12.21,19.91 12.71,20.42 13.92,20.42 14.43,19.91 Q1.3 | v11.38,20.55 12.08,19.85 EPD_C5.2
  Bottom 0.127: v11.38,20.55 v2.87,29.06
EPD_BUSY  (via drill 0.3)
  Top 0.127: v29.8,11.85 29.86,11.91 29.86,12.29 U1.P$AD12 | v9.86,18.64 9.86,18.77 10.3,19.21 10.55,19.21 J3.9
  Route2 0.127: v29.8,11.85 28.71,11.85 27.51,13.05 27.51,14.01 26.68,14.83 24.65,14.83 23.06,13.25 21.22,13.25 20.21,12.23 19,12.23 18.36,11.59 17.86,11.59 10.81,18.64 v9.86,18.64
EPD_CS  (via drill 0.3)
  Top 0.152: J3.12 15.1,17.72 v16.25,16.57
  Route2 0.152: v16.25,16.57 16.76,16.06 27.44,16.06 v27.44,15.97
  Route15 0.152: v27.44,15.97 27.48,15.93 v27.48,15.88
  Bottom 0.152: v27.48,15.88 27.41,15.95 U1.P$K2
  other vias: 27.41,16.07
EPD_DC  (via drill 0.3)
  Top 0.127: v29.35,11.09 29.35,12.29 U1.P$AD10 | v9.86,17.56 9.86,17.75 10.3,18.2 10.55,18.2 J3.11
  Route2 0.127: v29.35,11.09 27.38,11.09 26.75,10.45 25.92,10.45 24.84,9.37 24.84,9.24 23.13,7.53 20.4,7.53 17.16,10.77 16.14,10.77 11.95,14.96 11.95,15.47 v9.86,17.56
EPD_RST  (via drill 0.3)
  Top 0.152: J3.10 12.23,18.72 v14.35,16.6
  Route2 0.152: v14.35,16.6 15.67,15.28 v15.84,15.28
  Route15 0.152: v15.84,15.28 18.22,12.9 29.65,12.9 30.05,12.5 v30.05,9.73
  Bottom 0.152: v30.05,9.73 29.65,10.13 U1.P$AC11
  other vias: 29.66,12.82
GDR
  Top 0.127: Q3.1 15.13,31.79 14.49,31.79 R2_EP_DR.2 14.49,31.72 14.49,26.33 10.94,22.77 10.62,22.77 J3.2
GND  (via drill 0.3)
  Top 0.127: IC3.9 19.38,6.71 19.82,6.71 IC3.8 19.82,6.77 19.82,7.53 C19.2 19.82,7.59 19.82,8.67 19.95,8.8 19.95,9.5 19.92,9.53 | C23.1 17.35,10.26 17.86,10.26 17.98,10.13 C24.1 18.05,10.13 18.75,10.13 IC9.B1 18.81,10.13 18.81,9.82 IC9.C1 18.87,9.82 19.19,9.82 IC9.C2 19.25,9.82 19.57,9.82 IC9.C3 19.63,9.82 19.92,9.53 | 20.91,11.09 20.91,9.88 20.84,9.82 C25.2 | 20.91,11.09 20.91,12.17 C38.1 20.97,12.23 21.67,12.23 21.92,12.48 24.27,12.48 C6.2 | 19.79,11.31 20.02,11.09 20.91,11.09 | 19.79,11.31 19.76,11.34 19.76,12.1 C39.2 | C33.2 21.81,9.82 20.91,9.82 C25.2 | 19.92,9.53 19.95,9.56 20.59,9.56 20.78,9.75 C25.2 | 13.16,19.21 13.16,18.33 EPD_C6.1 13.22,18.26 13.22,17.25 EPD_C7.1 13.22,17.18 13.22,16.67 EPD_C8.1 13.22,15.91 EPD_C9.1 13.22,13.88 EPD_C10.1 13.28,13.82 13.28,12.8 EPD_C11.1 13.28,12.74 13.28,12.1 | 13.16,19.21 13.16,19.85 EPD_C5.1 | 13.16,19.21 14.94,19.21 15.13,19.41 15.13,20.29 14.3,21.12 13.28,21.12 EPD_C1.1 13.22,21.12 13.22,22.26 EPD_C2.1 13.22,22.33 13.22,22.77 15.13,24.68 17.92,24.68 18.05,24.55 18.08,24.52 | IC1.D2 19.13,12.74 18.75,12.74 18.68,12.67 R9.1 | R9.1 18.68,12.61 18.68,12.17 C37.1 18.75,12.1 18.75,11.47 19.06,11.15 19.44,11.15 19.57,11.28 19.76,11.28 19.79,11.31 | R9.1 18.62,12.61 U3.6 17.29,12.61 16.71,12.61 16.46,12.86 U3.9 | U3.1 15.38,13.56 15.7,13.56 16.4,12.86 U3.9 | U3.9 16.33,12.8 15.7,12.17 15.38,12.17 U3.4 15.32,12.1 14.68,12.1 C27.1 14.62,12.1 13.28,12.1 | 13.28,12.1 13.28,11.72 EPD_C12.1 13.22,11.66 12.52,10.96 8.01,10.96 J3.MP2 7.95,10.9 5.03,7.97 3.19,7.97 TP_BAT_GND.TP | 4.84,26.07 5.92,26.07 7.73,24.26
  Top 0.127: 4.84,26.07 0.77,26.07 C1-EP-DR.2 | 7.73,24.26 7.95,24.04 J3.MP1 | 4.84,26.07 4.84,31.79 6.81,33.76 9.98,33.76 10.55,33.18 12.78,33.18 D4.1 | IC2.B1 18.68,19.79 18.36,20.1 18.36,20.48 18.68,20.8 C32.1 18.68,20.87 18.68,22.83 18.05,23.47 18.05,24.48 18.08,24.52 | 20.62,27.06 20.91,27.34 R2_USB.2 20.84,27.47 20.78,27.47 19.82,28.42 19.82,28.93 J4.A12_B1 19.76,28.99 19.25,28.99 18.75,29.5 J4.SH4 | 20.62,27.06 18.08,24.52 | 20.62,27.06 20.65,27.02 21.29,26.39 22.17,26.39 22.68,26.9 22.68,27.15 D3.2 22.68,26.84 23.13,26.39 24.08,26.39 24.11,26.42 | 24.11,26.42 24.4,26.71 24.4,27.22 R1_USB.1 24.46,27.28 24.91,27.28 26.18,28.55 26.18,28.93 J4.A1_B12 26.24,28.99 26.81,28.99 27.32,29.5 J4.SH3 27.32,29.56 J4.SH1 | 10.21,19.63 10.24,19.66 10.55,19.66 J3.8 | 10.21,19.63 9.41,18.83 9.41,16.1 10.24,15.28 10.55,15.28 J3.17 | 17.92,33.18 18.11,33.18 18.62,33.69 J4.SH2 | 17.92,33.18 15.44,33.18 14.68,32.42 14.49,32.42 R2_EP_DR.1 14.43,32.42 14.05,32.04 14.05,30.58 | v19.19,18.26 18.68,18.77 C34.1 | J4.SH4 18.62,29.56 17.54,30.64 17.54,30.96 R_TYPE_SEL.1 17.54,31.02 17.92,31.41 17.92,33.18 | SJ1.1 15.38,29.31 15.38,29.12 16.14,28.36 17.54,28.36 18.68,29.5 J4.SH4 | 14.05,30.58 14.05,27.15 13.54,26.64 13.22,26.64 10.05,23.47 10.05,19.98 10.17,19.85 10.17,19.66 10.21,19.63 | 14.05,30.58 12.14,30.58 12.08,30.52 12.08,28.61 7.76,24.3 7.73,24.26 | 34.81,15.98 34.81,16.42 34.68,16.55 C3.2 | 34.81,15.98 34.81,14.9 34.3,14.39 C9.2 | C2.2 40.78,22.2 X1.2 40.84,21.88 41.48,21.25 41.48,19.21 41.03,18.77 40.27,18.77 39.7,19.34 C1.2 | C2.2 | C1.2 39.7,19.41 39.7,20.68 X1.4
  Top 0.127: 38.68,16.42 38.88,16.42 C22.2 38.68,16.42 | 38.68,16.42 37.86,16.42 C4.2 37.8,16.36 37.41,15.98 34.81,15.98 | 38.68,16.42 38.68,17.95 C10.2 | 38.49,18.2 38.68,18.01 C10.2 | 38.49,18.2 37.29,19.41 36.84,19.41 C11.2 | 38.49,18.2 39.64,19.34 C1.2 | 38.49,18.2 C10.2 | v12.33,5.75 12.33,5.24 C29.1 | SW_DN.1 13.41,3.97 13.92,4.48 v13.92,4.86 14.68,5.63 17.92,5.63 | 17.92,5.63 18.3,5.63 R3.1 | 18.52,4.13 17.92,4.74 17.92,5.63 | 18.52,4.13 18.55,4.1 20.65,4.1 21.92,5.37 23,5.37 23.32,5.05 C31.1 | TP_GND.TP 16.78,1.56 16.78,2.39 18.49,4.1 18.52,4.13 | C43.1 23.7,23.41 23.25,22.96 23.25,22.64 C42.2 23.25,22.58 23.25,22.39 24.65,20.99 C5.2 | C5.2 24.65,20.93 25.35,20.93 25.79,21.37 C14.2 25.86,21.44 25.86,22.07 26.59,22.8 | 21.44,18.04 21.73,17.75 21.73,17.56 22.3,16.99 C17.1 22.3,16.93 22.3,15.85 C18.1 | 21.44,18.04 19.76,19.72 IC2.B3 | C5.2 24.59,20.87 24.27,20.87 21.48,18.07 21.44,18.04 | 27.67,10.86 27.64,10.83 26.56,10.83 26.52,10.86 | 27.67,10.86 28.27,11.47 28.4,11.47 C21.2 | 26.52,10.86 26.05,11.34 26.05,11.53 C20.2 | SW_ENT.1 24.46,4.02 24.46,4.23 25.22,4.99 25.22,9.56 26.49,10.83 26.52,10.86 | J2.5 43.32,6.01 42.11,6.01 J2.3 42.05,5.94 42.05,5.5 41.1,4.55 41.1,3.47 40.14,2.51 37.35,2.51 35.64,4.23 | 35.64,4.23 35.64,4.16 35.45,3.97 SW_UP.1 35.64,4.23 | 35.64,4.23 35.64,4.93 C30.1 35.7,4.99 v35.7,5.56 | C15.2 29.22,19.72 30.3,19.72 C13.2 30.37,19.72 30.87,20.23 32.78,20.23 33.29,19.72 33.41,19.72 C12.2 33.48,19.72 37.7,23.94 40.44,23.94 40.65,23.72 40.78,23.72 C2.2 | C15.2 29.22,19.79 29.22,20.93 C16.2 29.16,20.99 29.16,22.01 28.33,22.83 26.62,22.83 26.59,22.8
  Top 0.127: v33.86,10.64 34.24,11.02 34.24,11.28 C8.2 | v31.95,10.32 31.95,11.02 31.51,11.47 C7.2 | 28.4,17.37 28.65,17.63 28.65,18.26 U1.P$B7 28.59,18.26 28.59,18.96 29.16,19.53 29.16,19.66 C15.2 | 28.4,17.37 U1.P$74 | U1.P$F23 32.91,17.12 32.21,17.12 32.02,17.31 U1.P$74 | U1.P$74 28.4,14.96 28.4,13.82 U1.P$87 28.46,13.82 29.54,13.82 U1.P$88 29.6,13.82 30.75,13.82 U1.P$89 30.81,13.82 31.95,13.82 U1.P$90 31.95,13.88 U1.P$86 | U1.P$83 28.4,15.02 U1.P$74 | U1.P$79 28.4,16.23 28.97,16.8 U1.P$74 | 28.4,17.37 U1.P$75 | 28.4,17.37 U1.P$74 | U1.P$84 29.54,15.02 29.54,15.34 U1.P$74 | U1.P$80 29.54,16.17 U1.P$74 | U1.P$76 29.54,17.31 29.03,16.8 U1.P$74 | U1.P$85 30.75,15.02 30.18,15.6 U1.P$74 | U1.P$81 30.75,16.17 U1.P$74 | U1.P$77 30.81,17.31 31.38,16.74 U1.P$74 | U1.P$82 31.95,16.23 31.45,16.74 U1.P$74 | U1.P$78 32.02,17.37 U1.P$74 | v28.46,9.44 27.7,10.2 27.7,10.83 27.67,10.86 | 24.11,26.42 24.14,26.39 24.14,25.44 26.56,23.02 26.56,22.83 26.59,22.8
  Route15 0.127: v31.95,10.32 31.95,13.75 U1.P$90
  Bottom 0.127: v19.19,18.26 19.19,28.99 18.68,29.5 J4.SH4 | v12.33,5.75 13.03,5.75 v13.92,4.86 17.16,4.86 18.36,3.66 22.62,3.66 28.4,9.44 v28.46,9.44 31.06,9.44 v31.95,10.32 32.27,10.64 v33.86,10.64 35.7,8.8 v35.7,5.56
  pour Top: -2.97,-1.98 -2.99,-2 -7.89,-6.9 48.45,-6.9 52.92,-2.43 52.92,33.26 48.96,37.22 -2.97,37.22
  pour Bottom: -1.32,-2.48 49.12,-2.48 49.12,39 -1.32,39
HAPTIC_EN  (via drill 0.3)
  Route15 0.152: U1.P$U1 26.31,14.92 26.31,15.15 24.8,16.66 v24.61,16.66
  Bottom 0.152: v24.61,16.66 21.45,19.82 21.45,20.14 21.31,20.28 IC2.A1
  other vias: 26.91,14.32 26.91,14.32 18.71,20.28
IMU_INT1  (via drill 0.3)
  Top 0.127: v26.43,14.26 26.43,14.83 26.87,15.28 U1.P$N1 | v21.79,8.1 21.79,6.96 20.52,5.69 20.4,5.69 IC3.5
  Route2 0.127: v26.43,14.26 26.43,13.37 21.79,8.74 v21.79,8.1
IMU_INT2  (via drill 0.3)
  Top 0.152: IC3.6 v19.82,6.16
  Route2 0.152: v19.82,6.16 24.24,10.58 25.05,10.58 v25.14,10.58
  Route15 0.152: v25.14,10.58 25.89,11.33 25.89,15.84 25.89,15.99 v26.05,16.15
  Bottom 0.152: v26.05,16.15 27.13,15.07 U1.P$P2
  other vias: 27.41,15.07
LX1  (via drill 0.3)
  Top 0.127: IC9.B2 19.25,10.2 19.57,10.2 IC9.B3 19.63,10.2 v20.08,10.2 | v17.29,9.82 16.52,9.82 15.76,10.58 L7.1
  Bottom 0.127: v20.08,10.2 17.67,10.2 v17.29,9.82
LX2  (via drill 0.3)
  Top 0.127: v14.1,7.79 14.89,8.58 L7.2
  Route2 0.127: IC9.D2 18.03,8.22 v18.03,8.03
  Route15 0.127: v18.03,8.03 17.69,7.69 15.65,7.69 15.26,7.69 v14.93,7.36
  Bottom 0.127: v14.93,7.36 14.5,7.79 v14.1,7.79
  other vias: 19.2,9.39
N$1
  Top 0.127: IC9.D1 18.75,9.37 18.36,9.37 18.24,9.24 R4.2
N$2
  Top 0.127: IC9.E1 18.75,8.93 18.62,8.93 18.3,8.61 R2.2
N$3
  Top 0.127: IC1.D1 19.13,13.18 18.68,13.18 R9.2
N$4
  Top 0.127: U1.P$N24 33.41,15.34 C9.1
N$5
  Top 0.127: L3.1 27,22.33 27,20.61 L2.2
N$6
  Top 0.127: U1.P$H23 32.97,16.61 33.29,16.61 33.86,17.18 35.06,17.18 35.64,16.61 C3.1 35.7,16.55 35.76,16.48 36.78,16.48 L1.1
N$7
  Top 0.127: R3.2 18.36,5.12 18.81,5.12 IC3.1
N$8
  Top 0.127: U1.P$B3 27.64,18.33 27.64,18.96 27.06,19.53 L2.1
N$9
  Top 0.127: U1.P$B24 33.8,18.33 36.84,21.37 40.21,21.37 40.84,20.74 X1.1 40.78,20.68 40.72,20.61 40.72,19.41 C1.1
N$10
  Top 0.127: U1.P$A23 32.97,18.83 33.92,18.83 37.22,22.14 39.64,22.14 X1.3 39.7,22.2 39.76,22.26 39.76,23.66 C2.1
N$11  (via drill 0.3)
  Top 0.127: v28.65,12.74 28.59,12.8 28.21,12.8 U1.P$AC5 | v26.87,12.17 26.43,12.17 26.05,12.55 C20.1
  Bottom 0.127: v28.65,12.74 27.45,12.74 v26.87,12.17
N$12
  Top 0.127: U1.P$A18 31.38,18.83 31.38,19.66 C13.1
N$18
  Top 0.127: R2_USB.1 21.09,27.85 21.09,28.8 21.22,28.93 J4.B5
N$19
  Top 0.127: R1_USB.2 24.4,27.85 24.4,28.8 24.27,28.93 J4.A5
N$23
  Top 0.127: L5.1 6.62,28.99 6.93,28.68 7.76,28.68 C2-EP-DR.2 7.82,28.61 8.01,28.61 8.87,27.76 | 8.87,27.76 9.35,27.28 D5.2 | Q3.3 15.76,33.88 15,33.88 8.9,27.79 8.87,27.76
N$25
  Top 0.127: C2-EP-DR.1 7.82,29.69 9.09,29.69 9.35,29.95 D2.1 9.35,30.01 9.35,33.12 D4.2
N$27
  Top 0.127: R1_EP_DR.1 17.48,32.11 17.48,31.6 R_TYPE_SEL.2 17.41,31.6 16.9,31.09 16.9,29.37 SJ1.2
N$28
  Top 0.127: J3.5 10.62,21.18 12.08,21.18 12.14,21.12 EPD_C1.2
N$29
  Top 0.127: J3.4 10.62,21.75 11.63,21.75 12.14,22.26 EPD_C2.2
N$30  (via drill 0.3)
  Top 0.127: v11.38,15.21 10.94,14.77 10.62,14.77 J3.18 | v12.08,19.02 12.08,18.39 12.14,18.33 EPD_C6.2
  Bottom 0.127: v11.38,15.21 11.38,18.33 v12.08,19.02
N$31
  Top 0.127: EPD_C7.2 12.18,15.79 J3.19
N$32
  Top 0.127: J3.20 10.62,13.75 11.19,13.75 11.82,14.39 12.59,14.39 12.71,14.52 12.76,14.56 EPD_C8.2
N$33
  Top 0.127: J3.22 10.62,12.74 11.13,12.74 12.21,13.82 EPD_C10.2
N$34
  Top 0.127: J3.24 12.27,11.72 EPD_C12.2
N$37
  Top 0.127: IC2.A2 19.25,20.29 19.25,20.8 C32.2
OUT+
  Top 0.127: IC2.A3 19.7,20.29 19.7,23.53 19.32,23.91 TP_OP.TP
OUT-
  Top 0.127: IC2.C3 19.76,19.28 19.76,18.96 20.14,18.58 20.14,17.37 19.89,17.12 18.68,17.12 17.67,18.14 17.67,21.37 15.63,23.41 TP_ON.TP
P0.00/XL1
  Top 0.127: U1.P$D2 27.38,17.56 27.13,17.56 27.06,17.5 24.4,17.5 24.27,17.63 X2.1 24.21,17.69 23.95,17.95 22.36,17.95 C17.2
P0.01/XL2
  Top 0.127: U1.P$F2 27.38,17.12 26.18,17.12 24.27,15.21 X2.2 24.21,15.15 23.89,14.83 22.36,14.83 C18.2
P0.13
  Top 0.127: U1.P$AD8 28.91,12.29 28.91,7.47 28.59,7.15 28.59,6.13 29.8,4.93 32.59,4.93 R5.1 | C30.2 35.06,4.93 32.65,4.93 R5.1 | SW_UP.2 32.59,3.97 32.59,4.86 R5.1
P0.14  (via drill 0.3)
  Top 0.127: C31.2 22.75,4.99 22.49,4.99 21.6,4.1 21.6,4.02 SW_ENT.2 21.62,3.77 22.36,3.02 v22.62,3.02 | v24.59,4.99 24.02,4.99 R8.1
  Route2 0.152: U1.P$AC9 29.42,12.56 31.02,12.56 31.5,12.08 31.5,10.77 31.5,10.63 28.46,7.59 28.13,7.26 28.13,4.98 v24.6,4.98 v24.59,4.99
  Bottom 0.127: v22.62,3.02 v24.59,4.99
  other vias: 29.16,12.82
P1.01  (via drill 0.3)
  Top 0.127: v32.97,13.05 32.97,13.56 U1.P$Y23 | v23.57,12.93 22.24,12.93 18.87,16.29 18.49,16.29 16.59,18.2 16.59,18.9 Q1.1 16.59,18.96 16.59,19.53 R_PWR_EPD.1
  Bottom 0.127: v32.97,13.05 29.6,13.05 28.27,11.72 24.78,11.72 v23.57,12.93
P1.02  (via drill 0.3)
  Top 0.127: v34.81,13.75 34.75,13.82 U1.P$W24 | v12.71,3.21 11.32,3.21 10.62,3.91 SW_DN.2 10.62,3.97 10.62,4.29 11.51,5.18 11.7,5.18 C29.2 11.76,5.24 11.76,5.82 12.14,6.2 12.52,6.2 12.84,5.88 12.84,5.18 R7.1
  Bottom 0.127: v34.81,13.75 34.81,12.61 36.14,11.28 36.14,5.37 34.18,3.4 23.64,3.4 22.81,2.58 22.43,2.58 21.6,3.4 12.9,3.4 v12.71,3.21
PMIC_INT  (via drill 0.3)
  Top 0.152: v21.88,10.83 21.88,11.66 IC1.A1
  Route2 0.152: U1.P$T2 24.01,11.17 23.43,11.17 23.37,11.17 v23.29,11.25
  Route15 0.152: v23.29,11.25 23,11.25 v22.55,11.7
  Bottom 0.152: v22.55,11.7 21.88,11.03 v21.88,10.83
  other vias: 27.41,14.57
PREVGH
  Top 0.127: D5.1 12.84,27.22 9.16,23.53 9.16,14.39 10.3,13.25 10.55,13.25 10.58,13.22 J3.21 12.22,14.82 EPD_C9.2
PREVGL
  Top 0.127: EPD_C11.2 12.21,12.74 11.7,12.23 J3.23 10.55,12.23 10.3,12.23 8.78,13.75 8.78,24.42 12.84,28.49 12.84,29.95 D2.2
RESE  (via drill 0.3)
  Top 0.127: R1_EP_DR.2 17.48,32.68 17.29,32.68 16.46,31.85 Q3.2 16.4,31.79 v15.13,30.52 | v14.94,26.26 10.94,22.26 10.62,22.26 J3.3
  Bottom 0.127: v14.94,26.26 14.94,30.33 v15.13,30.52
RESET  (via drill 0.3)
  Top 0.127: J2.6 43.38,7.28 43.38,7.66 44.27,8.55 44.27,12.8 43.77,13.31 TP_RESET.TP
  Top 0.152: v41.54,13.61 43.46,13.61 TP_RESET.TP
  Route2 0.152: U1.P$AC13 32.48,12.82 v32.61,12.69
  Route15 0.152: v32.61,12.69 40.05,12.69 v40.57,12.17
  Bottom 0.152: v40.57,12.17 41.54,13.14 v41.54,13.61
  other vias: 30.16,12.82
RF
  Top 0.127: L1.2 36.84,15.47 37.73,15.47 37.8,15.4 C4.1 37.86,15.4 38.88,15.4 C22.1 42.09,18.58 42.09,29.14 ANT1.1
SCL  (via drill 0.3)
  Top 0.127: v19.95,13.63 19.95,13.18 IC1.B1 | v18.3,18.14 18.3,19.02 18.55,19.28 18.68,19.28 IC2.C1 | v17.73,6.2 18.3,6.2 R17.2 | v17.22,8.23 17.22,8.74 17.67,9.18 R4.1 | v19.35,5.69 18.81,5.69 IC3.12 | v18.11,13.12 U3.7 | v26.24,8.8 27.89,7.15 27.89,6.45 28.52,5.82 28.52,2.58 TP_SCL.TP | v28.03,14.41 28.03,14.95 U1.P$M2
  Bottom 0.127: v18.3,18.14 18.3,16.93 19.95,15.28 v19.95,13.63 20.65,12.93 20.65,10.13 20.62,10.1 | 20.62,10.1 17.98,7.47 | 17.98,7.47 17.73,7.21 v17.73,6.2 18.24,5.69 v19.35,5.69 | 17.98,7.47 v17.22,8.23 15.57,8.23 13.03,10.77 13.03,12.17 14.43,13.56 14.81,13.56 15.25,13.12 v18.11,13.12 | 20.62,10.1 20.65,10.07 21.92,8.8 v26.24,8.8 28.03,10.59 v28.03,14.41
SDA  (via drill 0.3)
  Top 0.127: 19.22,13.53 19.19,13.56 17.35,13.56 U3.8 | 19.22,13.53 19.51,13.25 19.51,13.18 IC1.C1 | v23.25,14.26 25.03,14.26 26.56,15.79 26.87,15.79 U1.P$L1 | v20.74,13.79 20.42,13.79 20.14,14.07 19.76,14.07 19.25,13.56 19.22,13.53 | v17.29,7.34 17.67,7.72 17.67,8.61 R2.1 | v18.75,4.55 19.19,4.55 19.25,4.61 R18.2 19.32,4.67 19.32,5.12 IC3.2 | TP_SDA.TP 26.62,6.32 26.62,7.21 v25.67,8.16 25.73,8.16 25.73,8.93 25.98,9.18 v25.98,9.69
  Route2 0.127: v23.25,14.26 21.21,14.26 v20.74,13.79
  Route2 0.152: IC2.B2 19.21,19.06 v21.21,17.06
  Route15 0.152: v21.21,17.06 21.21,14.26 v20.74,13.79
  Bottom 0.127: v17.29,7.34 17.29,6.01 v18.75,4.55 18.75,4.61 18.94,4.61 22.49,8.16 v25.67,8.16 | v20.74,13.79 20.74,13.22 21.03,12.93 21.03,12.48 23.83,9.69 v25.98,9.69
  other vias: 19.21,19.78
SWDCLK
  Top 0.127: 38.53,12.32 41.22,9.63 41.22,8.1 42.05,7.28 J2.4 | 38.53,12.32 37.54,13.31 U1.P$AA24 | TP_SWDCLK.TP 42.56,21.46 42.56,16.36 38.56,12.36 38.53,12.32
SWDIO
  Top 0.127: U1.P$AC24 33.41,12.8 33.41,8.93 35,7.34 TP_SWDIO.TP 35,7.4 39.89,7.4 40.02,7.28 40.78,7.28 J2.2
SWO
  Top 0.127: U1.P$AD22 32.4,12.29 32.4,9.18 29.86,6.64 TP_SWO.TP
VBAT  (via drill 0.3)
  Top 0.127: IC1.C2 19.57,12.42 19.25,12.1
  Top 0.3: U3.2 15.38,13.05 U3.3 15.25,12.67 14.81,12.67 C27.2 14.62,12.67 v14.62,13.12 | v19.25,11.59 19.25,12.1 C37.2 | v13.47,10.96 10.05,7.53 9.09,7.53 TP_VBAT.TP
  Bottom 0.3: v19.25,11.59 17.79,11.59 16.65,12.74 15,12.74 | v14.62,13.12 15,12.74 | v13.47,10.96 13.47,11.15 14.94,12.61 15,12.74
VBUS  (via drill 0.3)
  Top 0.3: 22.68,30.14 24.71,30.14 25.35,29.5 25.35,28.99 J4.A4_B9 | 22.68,30.14 21.29,30.14 20.65,29.5 20.65,28.99 J4.A9_B4 | D3.5 22.75,24.68 22.75,23.6 C43.2 22.75,23.41 22.75,22.64 C42.1 22.75,22.52 v22.75,22.07 | IC1.A2 20.4,12.74 20.91,12.74 C38.2 21.03,12.67 v21.48,12.67 | U1.P$AD2 27.45,12.29 27.45,11.53 C21.1 27.25,11.47 27.06,11.28 v26.75,11.28 | v22.68,30.2 22.68,30.14
  Bottom 0.3: 22.75,12.67 23.06,12.67 24.46,11.28 v26.75,11.28 | 22.75,12.67 v21.48,12.67 | 22.75,12.67 22.75,12.8 v22.75,22.07 22.68,22.2 v22.68,30.2
VREG  (via drill 0.3)
  Top 0.127: IC1.B2 19.97,12.4 20.27,12.1
  Top 0.3: 19.19,10.58 18.81,10.58 | 18.81,10.58 IC9.A1 | 19.19,10.58 IC9.A2 | IC9.A3 19.57,10.58 19.32,10.58 19.19,10.58 | 17.35,10.9 17.79,10.9 17.98,11.09 C24.2 18.11,11.09 18.55,10.64 18.68,10.64 18.81,10.58 | 17.35,10.9 C23.2 | v20.21,11.53 20.27,11.59 20.27,12.1 C39.1 | v17.29,11.34 17.29,11.02 17.35,10.9 | v17.73,25.25 17.73,25.63 16.9,26.45 TP_VREG.TP
  Bottom 0.3: 19.95,11.53 v20.21,11.53 | 19.95,11.53 19.51,11.09 17.54,11.09 v17.29,11.34 | v17.73,25.25 17.73,15.09 19.89,12.93 19.89,11.66 19.95,11.53
(copper drawn outside any net)
  shapes: Bottom area x1, Top area x1